# Altium PCB board.PcbDoc
Units mil, origin at the board's own origin, x right, y up, seen from the top; angles counter-clockwise.
Board outline 3775 x 4450 mil, 2 copper layers (Top Layer, Bottom Layer); 38 components, 132 nets, 376 pads, 40 vias.
Unrouted connection lines stored in the file: 9.
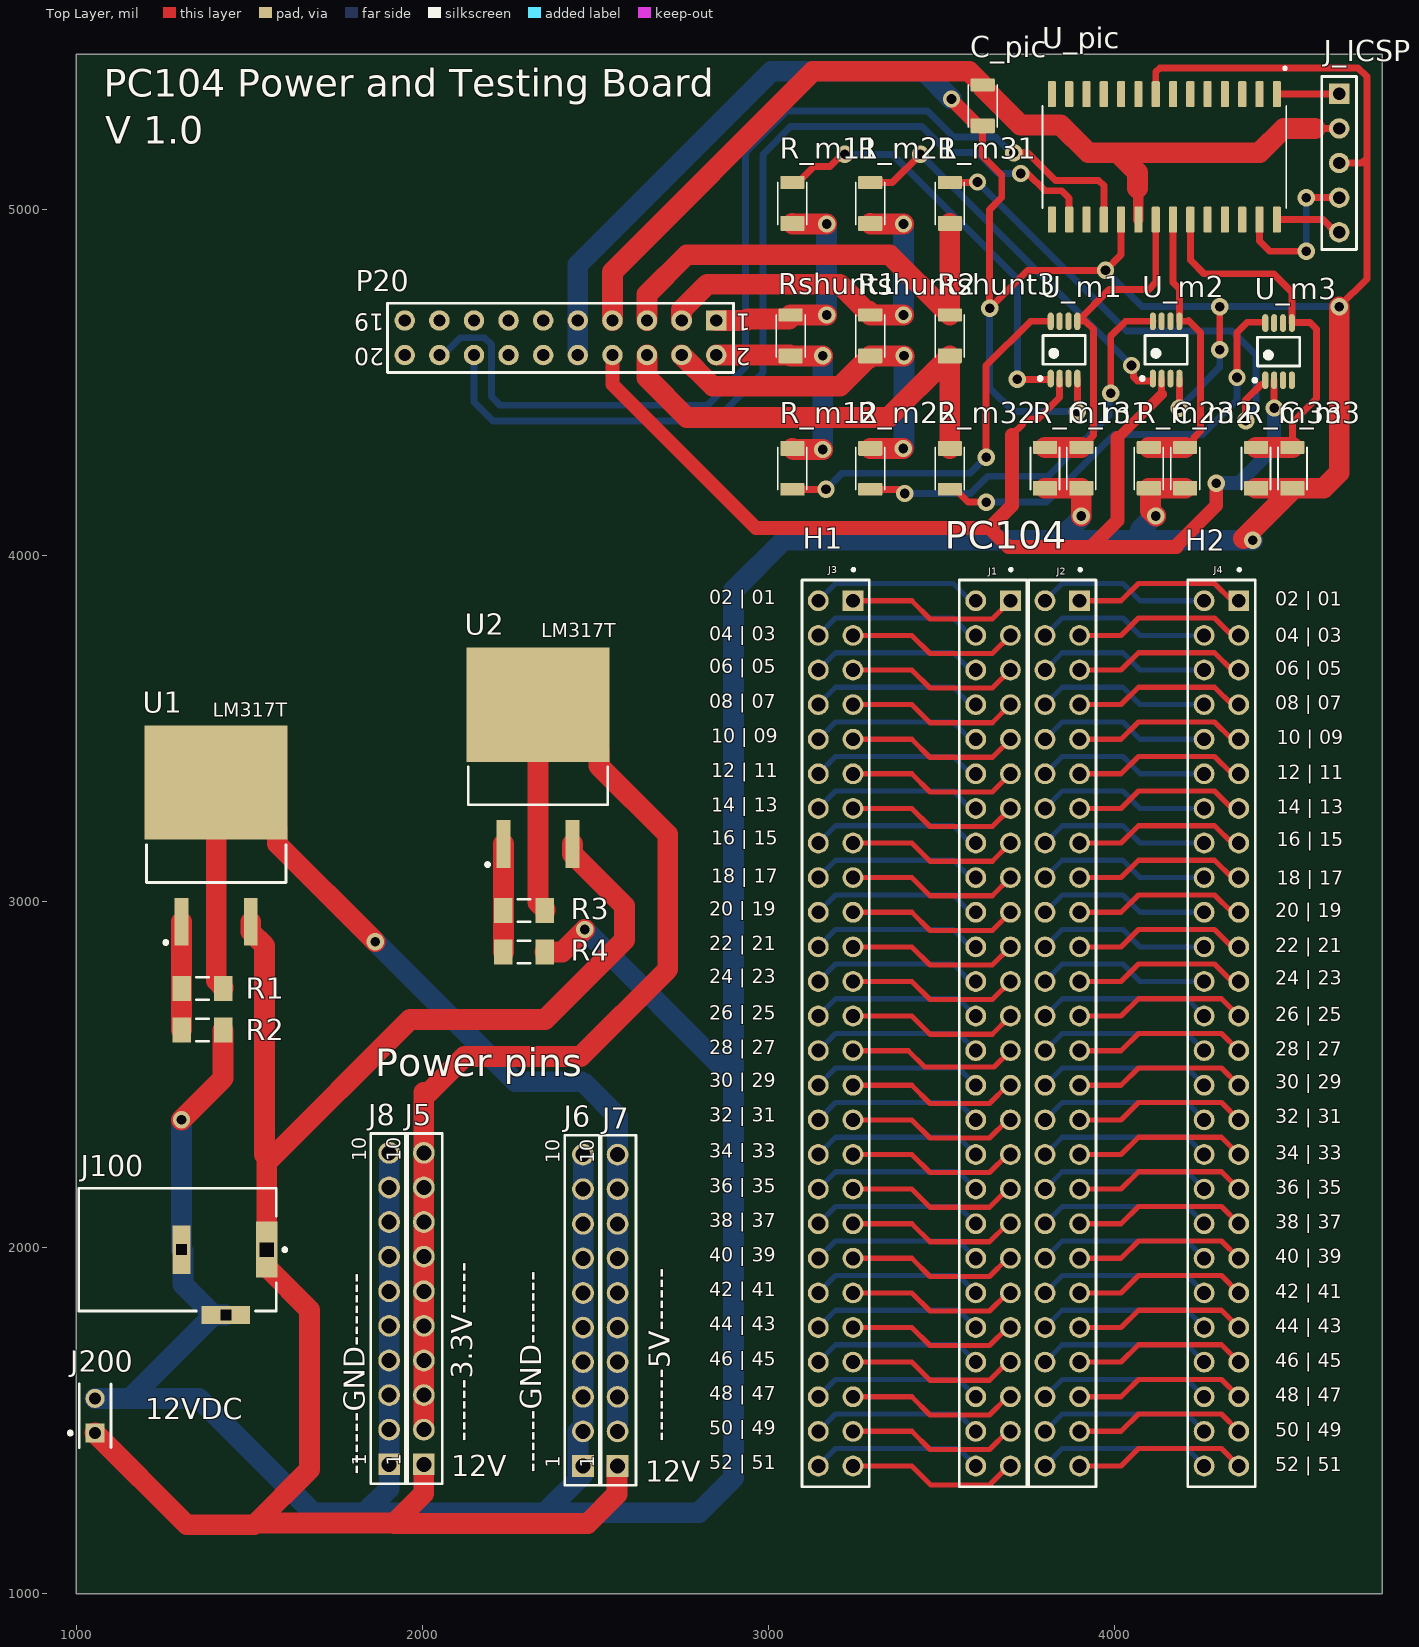
[diagram p0: Top Layer view]
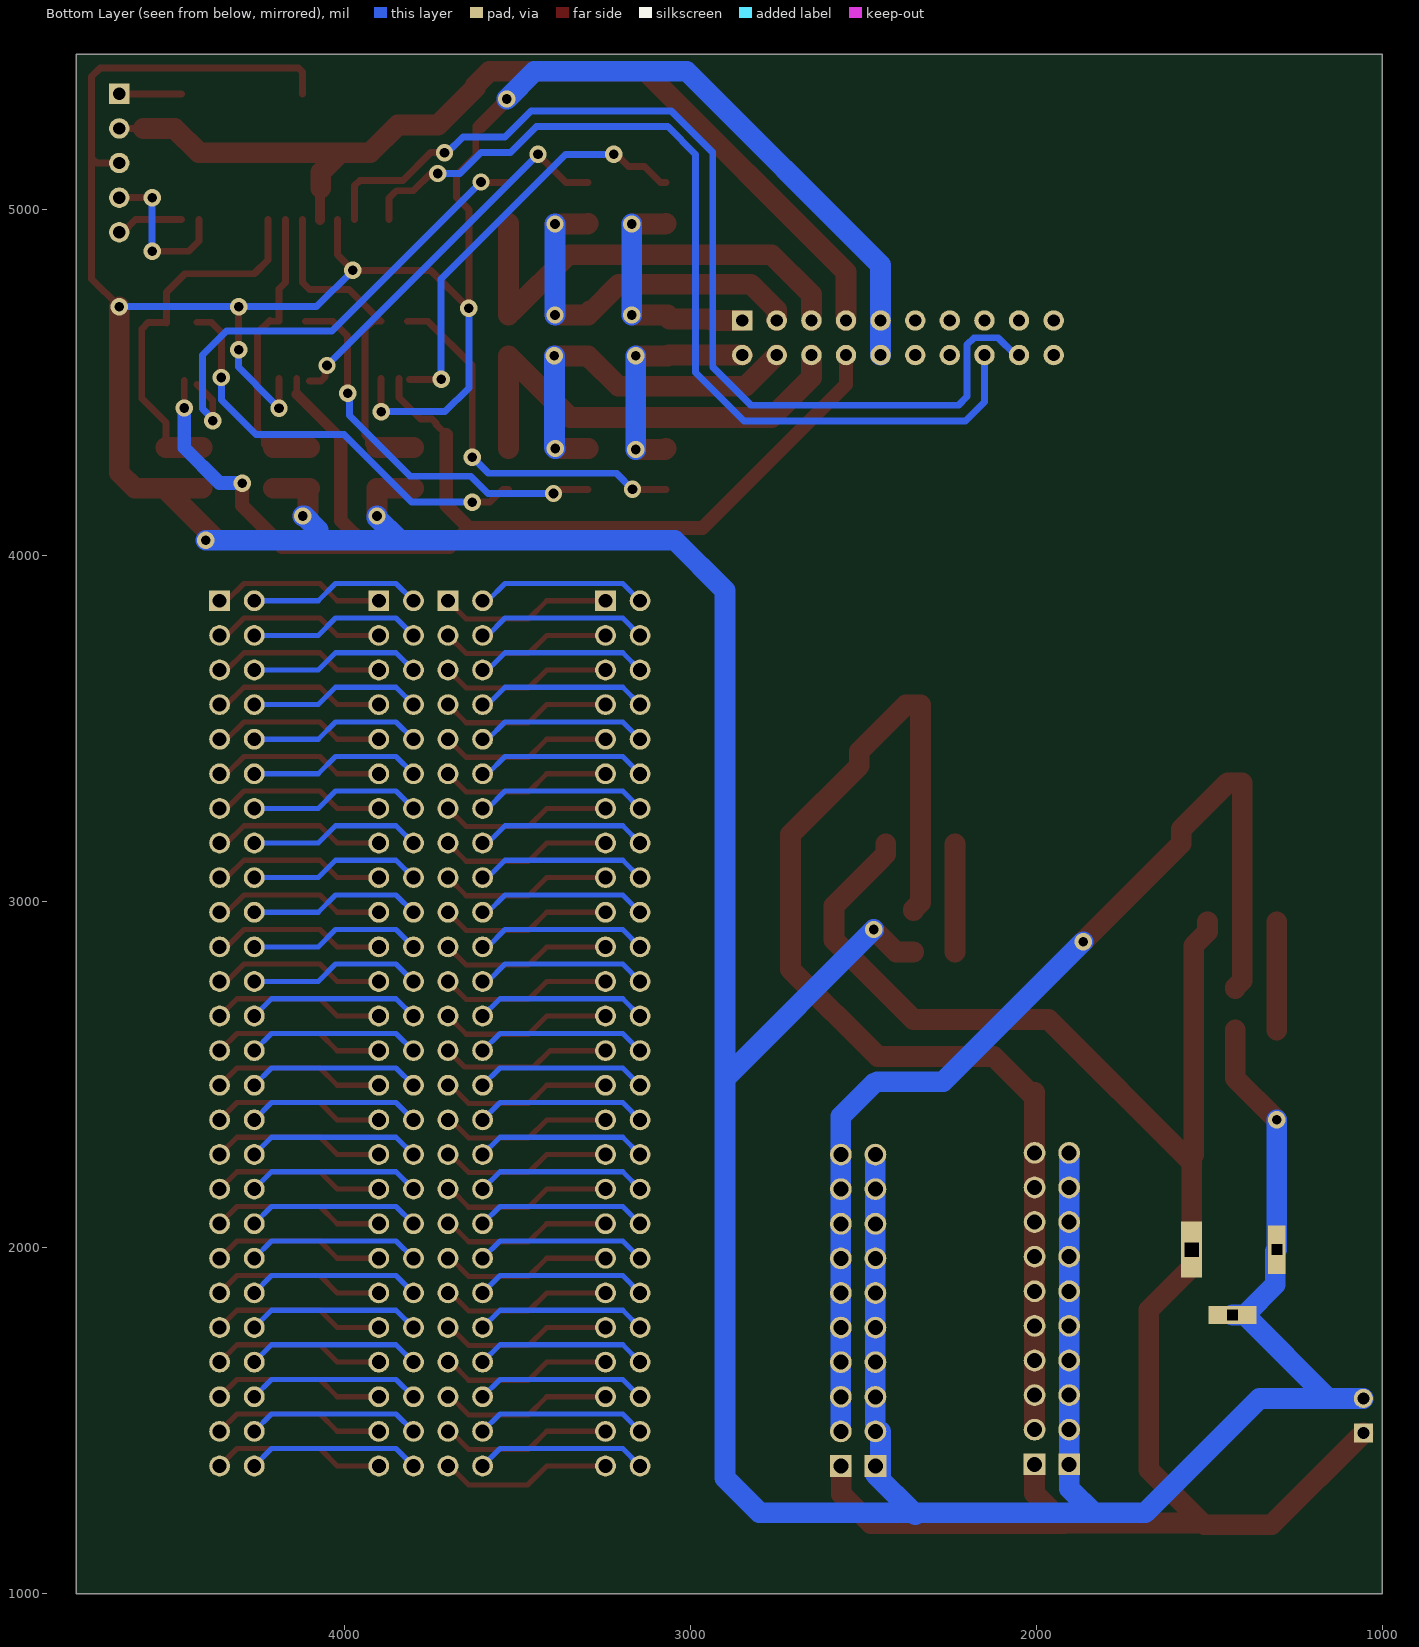
[diagram p1: Bottom Layer view, seen from below]

## Layer stack, top to bottom
Top Solder: solder mask 0.4, Solder Resist, Dk 3.5
Top Layer: signal copper 1.4
Dielectric 1: dielectric 12.6, FR-4, Dk 4.8
Bottom Layer: signal copper 1.4
Bottom Solder: solder mask 0.4, Solder Resist, Dk 3.5

## Board outline
1000,1000 4775,1000 4775,5450 1000,5450

## Design rules (kind name [scope] priority, off if disabled: settings)
Clearance [All] p1: gap=10 ignorepadtopadclearanceinfootprint=FALSE except(0: Arc-Hole Track-Hole SMDPad-Hole THPad-Hole Via-Hole Fill-Hole Poly-Hole Region-Hole Text-Hole)
ComponentClearance ComponentClearance_conn2 [InComponent('J5') vs InComponent('J8')] p1: gap=0 collisioncheckmode=3 verticalgap=0 showdistances=FALSE
ComponentClearance ComponentClearance_conn [InComponent('J6') vs InComponent('J7')] p2: gap=0 collisioncheckmode=3 verticalgap=0 showdistances=FALSE
ComponentClearance ComponentClearance_1 [InComponent('J3') vs InComponent('J4')] p3: gap=0 collisioncheckmode=3 verticalgap=0 showdistances=FALSE
ComponentClearance ComponentClearance_PC [InComponent('J3') vs InComponent('J4')] p4: gap=0 collisioncheckmode=3 verticalgap=10 showdistances=FALSE
ComponentClearance ComponentClearance_pc104 [InComponent('J1') vs InComponent('J2')] p5: gap=0 collisioncheckmode=3 verticalgap=0 showdistances=FALSE
ComponentClearance [All] p6: gap=10 collisioncheckmode=3 verticalgap=10 showdistances=FALSE
PolygonConnect [All] p1: connectstyle=Relief reliefconductorwidth=10 reliefentries=4 polygonreliefangle="90 Angle" airgapwidth=10
RoutingVias [All] p1: holewidth=28 width=50 viastyle="Through Hole" minholewidth=28 minwidth=50 maxholewidth=28 maxwidth=50
SolderMaskExpansion [All] p1: expansion=4 istentingtop=FALSE
Width [All] p1: maxlimit=1000 minlimit=15 preferedwidth=20
29 further rules are at their usual default settings.

## Classes and differential pairs
component class Current_Measurement: C_m1 C_m2 C_m3 C_pic J_ICSP P20 R_m11 R_m12 R_m13 R_m21 R_m22 R_m23 R_m31 R_m32 R_m33 Rshunt1 Rshunt2 Rshunt3 U_m1 U_m2 U_m3 U_pic
component class Schem: J1 J2 J3 J4 J5 J6 J7 J8 J100 J200 R1 R2 R3 R4 R24 R25 R26 Rcan S1 S4 U1 U2 U10

## Components (designator, comment, footprint, x,y, rotation, side; value= is the part's Value field where it differs from the comment)
C_m1 "22u" RESC3115X65N 3905,4252.68 r90 top
C_m2 "22u" RESC3115X65N 4205,4252.68 r90 top
C_m3 "22u" RESC3115X65N 4515,4252.68 r90 top
C_pic "100n" RESC3115X65N 3620,5300 r90 top
J1 "SSQ-126-03-G-D" *SAMTEC_SSQ-126-03-G-D_SSQ-126-03-G-D(Primary) 3650,2620 r90 top
J2 "SSQ-126-03-G-D" *SAMTEC_SSQ-126-03-G-D_SSQ-126-03-G-D(Primary) 3850,2620 r90 top
J3 "SSQ-126-03-G-D" *SAMTEC_SSQ-126-03-G-D_SSQ-126-03-G-D(Primary) 3195,2620 r90 top
J4 "SSQ-126-03-G-D" *SAMTEC_SSQ-126-03-G-D_SSQ-126-03-G-D(Primary) 4310,2620 r90 top
J5 "61301011121" 61301011121 2005,1824.76 r90 top
J6 "61301011121" 61301011121 2465,1819.76 r90 top
J7 "61301011121" 61301011121 2565,1819.76 r90 top
J8 "61301011121" 61301011121 1905,1824.76 r90 top
J100 "RAPC712X" SWITCH-RAPC712X-3_V 1428.03,1995 r270 top
J200 "5-146280-2" TECO-5-146280-2_V 1055,1515 r90 top
J_ICSP "" HDR1X5 4650,5335 r270 top
P20 "Header 10X2" HDR2X10 2850,4680 r180 top
R1 "CRCW12064K70FKEA" RESC3216X60X45ML15T20 1365,2750 r0 top
R2 "CRCW12064K70FKEA" RESC3216X60X45ML15T20 1365,2630 r180 top
R3 "CRCW12064K70FKEA" RESC3216X60X45ML15T20 2295,2975 r0 top
R4 "CRCW12064K70FKEA" RESC3216X60X45ML15T20 2295,2855 r180 top
R_m11 "150" RESC3115X65N 3070,5018.03 r90 top
R_m12 "150" RESC3115X65N 3070,4252.68 r270 top
R_m13 "7.5k" RESC3115X65N 3800,4252.68 r90 top
R_m21 "150" RESC3115X65N 3295,5018.03 r90 top
R_m22 "150" RESC3115X65N 3295,4252.68 r270 top
R_m23 "7.5k" RESC3115X65N 4100,4252.68 r90 top
R_m31 "150" RESC3115X65N 3525,5018.03 r90 top
R_m32 "150" RESC3115X65N 3525,4252.68 r270 top
R_m33 "7.5k" RESC3115X65N 4410,4252.68 r90 top
Rshunt1 "50m" RESC3115X65N 3065,4635.35 r90 top
Rshunt2 "50m" RESC3115X65N 3295,4635.35 r90 top
Rshunt3 "50m" RESC3115X65N 3525,4635.35 r90 top
U1 "LM317BD2TR4G" FP-936-03-MFG 1405,3240 r0 top
U2 "LM317BD2TR4G" FP-936-03-MFG 2335,3465 r0 top
U_m1 "LT6105IMS8#PBF" LT-MS8-8_L 3855,4595 r90 top
U_m2 "LT6105IMS8#PBF" LT-MS8-8_L 4150,4595 r90 top
U_m3 "LT6105IMS8#PBF" LT-MS8-8_L 4475,4590 r90 top
U_pic "PIC18LF26K83-I/SO" SOIC127P1030X265-28N 4145,5152.68 r270 top

## Footprints (in the part's own frame and the unit in brackets; to place one, negate y for a bottom-side part, rotate by r counter-clockwise, add the part's x,y. Pads: shape width x height; smd on the part's side, far side on the other; paste and mask are expansions set on the pad)
61301011121 [mm] "Pin Header, pitch 2.54 mm, THT, Vertical, single row, 10p"
  rect 1.6x1.6 hole 1.1: 1(-11.43,0)
  round 1.6 hole 1.1: 2(-8.89,0) 3(-6.35,0) 4(-3.81,0) 5(-1.27,0) 6(1.27,0) 7(3.81,0) 8(6.35,0) 9(8.89,0) 10(11.43,0)
  silkscreen extent -12.85,-1.34 12.85,1.34, body extent -12.7,-1.27 12.7,1.27, height 8.57
*SAMTEC_SSQ-126-03-G-D_SSQ-126-03-G-D(Primary) [mm]
  rect 1.53x1.53 hole 1.02: 01(31.75,-1.27)
  round 1.53 hole 1.02: 02(31.75,1.27) 03(29.21,-1.27) 04(29.21,1.27) 05(26.67,-1.27) 06(26.67,1.27) 07(24.13,-1.27) 08(24.13,1.27) 09(21.59,-1.27) 10(21.59,1.27) 11(19.05,-1.27) 12(19.05,1.27) 13(16.51,-1.27) 14(16.51,1.27) 15(13.97,-1.27) 16(13.97,1.27) 17(11.43,-1.27) 18(11.43,1.27) 19(8.89,-1.27) 20(8.89,1.27) 21(6.35,-1.27) 22(6.35,1.27) 23(3.81,-1.27) 24(3.81,1.27) 25(1.27,-1.27) 26(1.27,1.27) 27(-1.27,-1.27) 28(-1.27,1.27) 29(-3.81,-1.27) 30(-3.81,1.27) 31(-6.35,-1.27) 32(-6.35,1.27) 33(-8.89,-1.27) 34(-8.89,1.27) 35(-11.43,-1.27) 36(-11.43,1.27) 37(-13.97,-1.27) 38(-13.97,1.27) 39(-16.51,-1.27) 40(-16.51,1.27) 41(-19.05,-1.27) 42(-19.05,1.27) 43(-21.59,-1.27) 44(-21.59,1.27) 45(-24.13,-1.27) 46(-24.13,1.27) 47(-26.67,-1.27) 48(-26.67,1.27) 49(-29.21,-1.27) 50(-29.21,1.27) 51(-31.75,-1.27) 52(-31.75,1.27)
  silkscreen extent -33.28,-2.47 34.13,2.47
FP-936-03-MFG [mil]
  rect 40x137.95 smd paste+0 mask+0: 1(-100,-297.55) 3(100,-297.55)
  rect 412.99x329.92 smd paste+0 mask+0: 4(0,104.54)
  silkscreen extent -201,-362 201,-75, body extent -218,-370 218,273, height 10
HDR1X5 [mm] "Connector; Header; 5 Position"
  rect 1.5x1.5 hole 0.9: 1(0,0)
  round 1.5 hole 0.9: 2(2.54,0) 3(5.08,0) 4(7.62,0) 5(10.16,0)
  silkscreen extent -1.27,-1.27 11.43,1.27
HDR2X10 [mm] "Connector; Header; 10x2 Position"
  rect 1.5x1.5 hole 0.9: 1(0,0)
  round 1.5 hole 0.9: 2(0,2.54) 3(2.54,0) 4(2.54,2.54) 5(5.08,0) 6(5.08,2.54) 7(7.62,0) 8(7.62,2.54) 9(10.16,0) 10(10.16,2.54) 11(12.7,0) 12(12.7,2.54) 13(15.24,0) 14(15.24,2.54) 15(17.78,0) 16(17.78,2.54) 17(20.32,0) 18(20.32,2.54) 19(22.86,0) 20(22.86,2.54)
  silkscreen extent -1.27,-1.27 24.13,3.81
LT-MS8-8_L [mm] "SOP, 8-Leads, Body 3x3mm, Pitch 0.65mm, IPC High Density"
  oval 1.3x0.45 smd: 1(-2.1,0.975) 2(-2.1,0.325) 3(-2.1,-0.325) 4(-2.1,-0.975) 5(2.1,-0.975) 6(2.1,-0.325) 7(2.1,0.325) 8(2.1,0.975)
  silkscreen extent -2.22,-1.55 1.05,1.87, body extent -1.55,-1.55 1.55,1.55, height 1.1
RESC3115X65N [mm]
  rrect14% 1.09x1.77 smd: 1(-1.465,0)
  rrect14% 0.94x1.77 smd: 2(1.54,0)
  silkscreen extent -1.55,-1.06 1.55,1.06
RESC3216X60X45ML15T20 [mm] "Chip Resistor, 2-Leads, Body 3.3x1.75mm, IPC Low Density"
  rect 1.35x1.85 smd: 1(-1.525,0) 2(1.525,0)
  silkscreen extent -0.45,-0.82 0.45,0.82, body extent -1.65,-0.87 1.65,0.87, height 0.6
SOIC127P1030X265-28N [mm]
  rrect25% 1.9x0.6 smd: 1(-4.605,8.255) 2(-4.605,6.985) 3(-4.605,5.715) 4(-4.605,4.445) 5(-4.605,3.175) 6(-4.605,1.905) 7(-4.605,0.635) 8(-4.605,-0.635) 9(-4.605,-1.905) 10(-4.605,-3.175) 11(-4.605,-4.445) 12(-4.605,-5.715) 13(-4.605,-6.985) 14(-4.605,-8.255) 15(4.605,-8.255) 16(4.605,-6.985) 17(4.605,-5.715) 18(4.605,-4.445) 19(4.605,-3.175) 20(4.605,-1.905) 21(4.605,-0.635) 22(4.605,0.635) 23(4.605,1.905) 24(4.605,3.175) 25(4.605,4.445) 26(4.605,5.715) 27(4.605,6.985) 28(4.605,8.255)
  silkscreen extent -6.6,-8.95 3.75,8.95
SWITCH-RAPC712X-3_V [mm] "CONN, 3-Leads, Body 14.5x9mm"
  rect 4.1x1.55 hole 1.01 square: 1(0,3.125)
  rect 3.55x1.3 hole 0.76 square: 2(0,-3.125)
  rect 1.3x3.55 hole 0.76 square: 3(4.8,0.125)
  silkscreen extent -4.5,-10.67 4.5,4.58, body extent -4.5,-10.68 4.5,3.83, height 11
TECO-5-146280-2_V [mm] "Connector, 2-Leads, Body 4.67x2.34mm, Pitch 2.54mm"
  rect 1.4x1.4 hole 0.89: 1(-1.27,0)
  round 1.4 hole 0.89: 2(1.27,0)
  silkscreen extent -2.34,-1.17 2.34,1.94, body extent -2.34,-1.17 2.34,1.17, height 5.33

## Part data
C_m1 C_m2 C_m3 C_pic: library part Capacitor, "Capacitor"
J5 J6 J7 J8: library part CMP-1502-01082-1, "THT Vertical Pin Header WR-PHD, Pitch 2.54 mm, Single Row, 10 pins", Contact Resistance=20mOhm, Manufacturer="Wurth Elektronik", Operating Temperature=-40to105degC, Rated Current=3A, Withstanding Voltage=500VAC, Working Voltage=250VAC, Datasheet URL=https://katalog.we-online.de/em/datasheet/6130xx11121.pdf, Gender=Male, Manufacturer URL=http://www.we-online.de, Mounting Technology=THT, Orientation=Vertical, Package Reference=61301011121, Packaging=Bag, Part Number=61301011121, Pin Number=10, Pitch=2.54mm, Publisher=WurthElektronik, Row Number=Single
J100: library part CMP-2000-05383-1, "Conn Powerjack Mini R/A PCMT, 5 A, 3-Pin THD, RoHS", Color=Black, Current Rating=5A, Manufacturer=Switchcraft, Standard Package=2,500, Catalog Drawings="RAPC7(1,2)2XSide /  / RAPC7(1,2)2XTop", Category=Connectors,Interconnects, Connector Type=Jack, Contact Material=Brass, Contact Material - Plating=Nickel, Datasheet URL=https://datasheet.ciiva.com/391/rapc712x-cd-391666.pdf, Datasheet Version="Rev. A, 08/2005", Dynamic Catalog=SwitchcraftInc, Family=Barrel-PowerConnectors, Gender=Male, Housing Color=Black, Housing Material=Thermoplastic, Internal Switch(s)=SingleSwitch,NormallyClosed, Manufacturer URL=http://www.switchcraft.com/, Mating Products="SC1539-ND / -CONNPLUGMINIPWR2CONDBLK/RED / SC1051-ND / -CONNPLUGMINIPOWER2CONDBLACK", Mounting Type=ThroughHole,RightAngle, Number of Positions/Contacts=2Conductors,2Contacts, Other Names="Q2387461 / Q2526383 / RAPC712X-ND / SC237", Plug/Mating Plug Diameter=2.5mmID,5.5mmOD, RoHS Information=SwitchcraftRoHSInfo, Shielding=Unshielded, Termination=SolderEyelet(s)
J200: library part CMP-2000-07492-1, "Male Header, Pitch 2.54 mm, 1 x 2 Position, Height 8.21 mm, Tail Length 3.05 mm, -65 to 105 degC, RoHS, Bulk", Case\/Package=100, Colour=Black, Current Rating=3A, Flammability Rating=UL94V-0, High Temperature Housing=Yes, Manufacturer="TE Connectivity", Max Current Rating=5A, Max Operating Temperature=105degC, Min Operating Temperature=-65degC, Package Description="Male Header, Pitch 2.54 mm, 1 x 2 Position, Height 8.21 mm, Tail Length 3.05 mm", Package Quantity=500, Approvals=CSA, Board Standoff=No(Without), Connector Type=Header, Contact Gender=Male, Contact Material=CopperAlloy, Contact Mating Length=0.23inch, Contact Plating=Matte, Contact Protection=No(Without), Contact Shape=Square, Datasheet URL=http://www.te.com/commerce/DocumentDelivery/DDEController?Action=showdoc&DocId=Customer+Drawing%7F146280%7FH1%7Fpdf%7FEnglish%7FENG_CD_146280_H1.pdf%7F5-146280-2, Datasheet Version="Rev. H1, 08/2016", Depth=2.34mm, Gasket=No(Without), High Speed Serial Data Connector=No, Housing Colour=Black, Housing Material=Polymer, Keyed=No, Length=4.67mm, Manufacturer URL=http://www.te.com/, Mating Alignment=No(Without), Mating Connector Lock=No(Without), Mating Post Length=0.23inch, Mount=ThroughHole, Mounting Technology=ThroughHole, Number Of Contacts=2, Number of Positions=2, Number Of Rows=1, Orientation=Straight, Package Reference=5-146280-2, Packaging=Carton, Panel Mount Retention=No(Without), PCB Mount Retention=Without, PCB Mounting Orientation=Vertical, PCB Thickness=0.063inch, Pitch=2.54mm, Radiation Hardening=No, RoHSCompliant=true, Row Spacing=2.54mm, Selectively Loaded=No(Without), Stabilizers=No(Without), Termination=ThroughHole, Termination Post Length=0.12inch
J_ICSP: library part PinHeader1x5, "Plug connector"
P20: "Header, 10-Pin, Dual row", LatestRevisionDate=17-Jul-2002, LatestRevisionNote="Re-released for DXP Platform.", Publisher="Altium Limited"
R1 R2 R3 R4: library part CMP-2100-03618-1, "Chip Resistor, 4.7 KOhm, +/- 1%, 0.25 W, -55 to 155 degC, 1206 (3216 Metric), RoHS, Tape and Reel", Case Code (Imperial)=1206, Case Code (Metric)=3216, Manufacturer="Vishay Semiconductor", Max Operating Temperature=155degC, Max Power Dissipation=250mW, Min Operating Temperature=-55degC, Package Description="2-Pin Surface Mount Device, Body 3.15 x 1.6 mm", Package Quantity=10, Package Reference=1206.0, Resistance=4.7KOhm, Temperature Coefficient=100ppm/degreesC, Tolerance=1%, Voltage Rating=200V, Case/Package=1206, Composition=ThickFilm, Contact Plating=Tin, Datasheet URL=http://www.vishay.com/docs/20035/dcrcwe3.pdf, Datasheet Version=41061.0, Depth=1.6mm, Height=0.55mm, Lead Free=LeadFree, Length=3.2mm, Manufacturer URL=http://www.vishay.com/, Military Standard=Not, Mount=SurfaceMount, Number of Terminations=2, Packaging=TapeandReel, Power Rating=250mW, Radiation Hardening=No, REACH SVHC=Unknown, RoHSCompliant=true, Termination=SMD/SMT, Voltage Rating (DC)=200V, Weight=0.000353oz, Width=1.6mm
R_m11 R_m12 R_m13 R_m21 R_m22 R_m23 R_m31 R_m32 R_m33 Rshunt1 Rshunt2 Rshunt3: library part Resistor, "Resistor"
U1 U2: library part CMP-07128-000007-1, "IC REG LINEAR POS ADJ 1.5A D2PAK", Dropout Voltage=2.25V, Manufacturer="ON Semiconductor", Max Junction Temp=+125°C, Max Supply Voltage=40V, Min Supply Voltage=2.8V, Output Current=1.5A, Output Voltage=1.2-37V, Package=936-03, Temperature="-40°C to +125°C", Temperature Range Low=-40°C, Automotive=Yes, Automotive Grade="Grade 1", Category=IC, ComponentLink2Description=Datasheet, ComponentLink2URL=https://www.onsemi.com/pub/Collateral/LM317-D.PDF, Device Class L1="Integrated Circuits (ICs)", Device Class L2="Power Management ICs", Device Class L3="Voltage Regulators - Linear", Digikey Description="IC REG LINEAR POS ADJ 1.5A D2PAK", Footprint Url=https://www.onsemi.com/pub/Collateral/936-03.PDF, Height=4.826mm, Lead Free=Yes, Manufacturer Part Number=LM317BD2TR4G, Mouser Description="Linear Voltage Regulators 1.5A ADJ 1.2-37V Positive", Number Of Outputs=1, Octopart=https://octopart.com/lm317bd2tr4g-on+semiconductor-530493, Output Type=AdjustableProgrammable, RoHS=TRUE, Standoff Height=0mm, Temperature Range High=+125°C
U_m1 U_m2 U_m3: "Single Channel, Precision, Rail-to-Rail Input Current Sense Amplifier, 0.1 MHz Typical GBW, 2.85 to 36 V, 8-Pin SOP (MS8-8), Industrial, Pb-Free", Linear Technology Part Number=LT6105, Manufacturer="Linear Technology", Channels (#)=1, ComponentLink1Description="Manufacturer URL", ComponentLink1URL=http://www.linear.com/, ComponentLink2Description=Datasheet, ComponentLink2URL=http://cds.linear.com/docs/en/datasheet/6105fa.pdf, ComponentLink3Description="Package Specification", ComponentLink3URL=http://cds.linear.com/docs/en/packaging/05081610_G_SO8.pdf, DatasheetVersion="Rev. A", GBW (MHz) Typical=0.1, Is (mA) Typical=0.2, Mounting Technology="Surface Mount", PackageDescription="8-Lead Plastic Small Outline, Body 3.9 x 4.9 mm, Pitch 1.27 mm", PackageReference=LT-MS8-8, PackageVersion="Rev G", PartNumber=LT6105IMS8#PBF, RevisionNote="URLs updated", RoHS=Pb-Free, Type=CSA, Vos (mV) Guaranteed=0.3, Vos (mV) Typical=0.1, Vs Max (V)=36, Vs Min (V)=2.85
U_pic: library part PIC18F26K83-_/SO, "Flash Microcontrollers  with 10-Bit A/D and nanoWatt Technology"
J1 J2 J3 J4: Check_prices=https://www.snapeda.com/parts/SSQ-126-03-G-D/Samtec/view-part/3311208/?ref=eda, SnapEDA_Link=https://www.snapeda.com/parts/SSQ-126-03-G-D/Samtec/view-part/3311208/?ref=snap

## Via types
v1: diameter 50, hole 28, Top Layer to Bottom Layer, 40 vias

## Nets (pads, with @x,y where several pads share a name; then routed paths per layer and width w, separated by ;. In a path a pad name is that pad's centre, name@x,y a point inside that pad or via, vN(x,y) a via of type N, cw(c..) or ccw(c..) an arc to the next point about the centre after c; other vN are vias at no path point)
3.3V: C_pic.2 J_ICSP.2 P20.7 U_pic.20 | length 2825.6
  Top Layer w20: 4580,5235 J_ICSP.2
  Top Layer w30: U_pic.20 4070,5060
  Top Layer w60: P20.7 2550,4820 3130,5400 3580.63,5400 3620.63,5360 3620.63,5353.35 3728.98,5245 3845,5245 3925,5165 4010,5165 ; 4067.65,5062.35 4067.65,5107.35 4010,5165 ; 4580,5235 4490,5235 4420,5165 4010,5165
5V: P20.8 U_m1.2 U_m2.2 U_m3.2 | length 3642.6
  Top Layer w20: 3705,4350 3735,4380 3735,4383.28 3746.72,4395 3780,4395 3842.2,4457.2 U_m1.2 ; 4137.2,4467.2 U_m2.2 ; v1(4462.2,4427.2) U_m3.2
  Top Layer w30: 4010,4340 4137.2,4467.2
  Top Layer w40: P20.8 2550,4495 2965,4080 3640,4080 ; 3705,4350 3705,4145 3640,4080 ; 3937.5,4030 4010,4102.5 4010,4340 ; 4180,4025 3695,4025 3640,4080 ; 4180,4030 4295,4145 v1(4295,4210)
  Bottom Layer w40: v1(4295,4210) 4360,4210 4462.2,4312.2 v1(4462.2,4427.2)
+3V3: J5.2 J5.3 J5.4 J5.5 J5.6 J5.7 J5.8 J5.9 J5.10 R3.2 U2.4 | length 3359.3
  Top Layer w60: J5.2 J5.3 J5.4 J5.5 J5.6 J5.7 J5.8 J5.9 J5.10 2005,2450 ; 2020,2450 2122.84,2552.84 2457.84,2552.84 2710,2805 2710,3194.54 2511.5,3393.04 2511.5,3434.58 2376.54,3569.54 U2.4 2335,2998.03 2355.04,2977.99 R3.2
+5V: J7.2 J7.3 J7.4 J7.5 J7.6 J7.7 J7.8 J7.9 J7.10 R1.2 U1.4 | length 3085.3
  Top Layer w60: R1.2 1425.04,2752.99 1405,2773.03 U1.4 1446.54,3344.54 1581.5,3209.58 1581.5,3168.04 v1(1864.54,2885) v1@1865,2885
  Bottom Layer w60: v1(1864.54,2885) 2269.54,2480 2460,2480 ; 2470,2475 2565,2380 J7.10 J7.9 J7.8 J7.7 J7.6 J7.5 J7.4 J7.3 J7.2
A1: J1.01 J3.01 | length 498.4
  Top Layer w15: J3.01 3415,3870 3467.38,3817.62 3647.62,3817.62 J1.01
A3: J1.03 J3.03 | length 498.4
  Top Layer w15: J3.03 3415,3770 3467.38,3717.62 3647.62,3717.62 J1.03
A5: J1.05 J3.05 | length 498.4
  Top Layer w15: J3.05 3415,3670 3467.38,3617.62 3647.62,3617.62 J1.05
A7: J1.07 J3.07 | length 498.4
  Top Layer w15: J3.07 3415,3570 3467.38,3517.62 3647.62,3517.62 J1.07
A9: J1.09 J3.09 | length 498.4
  Top Layer w15: J3.09 3415,3470 3467.38,3417.62 3647.62,3417.62 J1.09
A11: J1.11 J3.11 | length 498.4
  Top Layer w15: J3.11 3415,3370 3467.38,3317.62 3647.62,3317.62 J1.11
A13: J1.13 J3.13 | length 511
  Top Layer w10: J1.13 J1.13@3708.92,3261.08
  Top Layer w15: J3.13 3415,3270 3467.38,3217.62 3647.62,3217.62 J1.13
A15: J1.15 J3.15 | length 498.4
  Top Layer w15: J3.15 3415,3170 3467.38,3117.62 3647.62,3117.62 J1.15
A17: J1.17 J3.17 | length 498.4
  Top Layer w15: J3.17 3415,3070 3467.38,3017.62 3647.62,3017.62 J1.17
A19: J1.19 J3.19 | length 498.4
  Top Layer w15: J3.19 3415,2970 3467.38,2917.62 3647.62,2917.62 J1.19
A21: J1.21 J3.21 | length 498.4
  Top Layer w15: J3.21 3415,2870 3467.38,2817.62 3647.62,2817.62 J1.21
A23: J1.23 J3.23 | length 498.4
  Top Layer w15: J3.23 3415,2770 3467.38,2717.62 3647.62,2717.62 J1.23
A25: J1.25 J3.25 | length 498.4
  Top Layer w15: J3.25 3415,2670 3467.38,2617.62 3647.62,2617.62 J1.25
A27: J1.27 J3.27 | length 494.4
  Top Layer w15: J3.27 3405,2570 3452.62,2522.38 3652.38,2522.38 J1.27
A29: J1.29 J3.29 | length 498.4
  Top Layer w15: J3.29 3415,2470 3467.38,2417.62 3640,2417.62 3692.38,2470 J1.29
A31: J1.31 J3.31 | length 498.4
  Top Layer w15: J3.31 3415,2370 3467.38,2317.62 3640,2317.62 3692.38,2370 J1.31
A33: J1.33 J3.33 | length 498.4
  Top Layer w15: J3.33 3415,2270 3467.38,2217.62 3640,2217.62 3692.38,2270 J1.33
A35: J1.35 J3.35 | length 498.4
  Top Layer w15: J3.35 3415,2170 3467.38,2117.62 3640,2117.62 3692.38,2170 J1.35
A37: J1.37 J3.37 | length 498.4
  Top Layer w15: J3.37 3415,2070 3467.38,2017.62 3640,2017.62 3692.38,2070 J1.37
A39: J1.39 J3.39 | length 498.4
  Top Layer w15: J3.39 3415,1970 3467.38,1917.62 3640,1917.62 3692.38,1970 J1.39
A41: J1.41 J3.41 | length 498.4
  Top Layer w15: J3.41 3415,1870 3467.38,1817.62 3640,1817.62 3692.38,1870 J1.41
A43: J1.43 J3.43 | length 498.4
  Top Layer w15: J3.43 3415,1770 3467.38,1717.62 3640,1717.62 3692.38,1770 J1.43
A45: J1.45 J3.45 | length 498.4
  Top Layer w15: J3.45 3415,1670 3467.38,1617.62 3640,1617.62 3692.38,1670 J1.45
A47: J1.47 J3.47 | length 498.4
  Top Layer w15: J3.47 3415,1570 3467.38,1517.62 3640,1517.62 3692.38,1570 J1.47
A49: J1.49 J3.49 | length 498.4
  Top Layer w15: J3.49 3415,1470 3467.38,1417.62 3640,1417.62 3692.38,1470 J1.49
A51: J1.51 J3.51 | length 500.6
  Top Layer w15: J3.51 3415,1370 3470,1315 3640,1315 3695,1370 J1.51
B2: J1.02 J3.02 | length 496.4
  Bottom Layer w15: J3.02 3195,3920 3535,3920 3585,3870 J1.02
B4: J1.04 J3.04 | length 496.4
  Bottom Layer w15: J3.04 3195,3820 3535,3820 3585,3770 J1.04
B6: J1.06 J3.06 | length 496.4
  Bottom Layer w15: J3.06 3195,3720 3535,3720 3585,3670 J1.06
B8: J1.08 J3.08 | length 496.4
  Bottom Layer w15: J3.08 3195,3620 3535,3620 3585,3570 J1.08
B10: J1.10 J3.10 | length 496.4
  Bottom Layer w15: J3.10 3195,3520 3535,3520 3585,3470 J1.10
B12: J1.12 J3.12 | length 496.4
  Bottom Layer w15: J3.12 3195,3420 3535,3420 3585,3370 J1.12
B14: J1.14 J3.14 | length 496.4
  Bottom Layer w15: J3.14 3195,3320 3535,3320 3585,3270 J1.14
B16: J1.16 J3.16 | length 496.4
  Bottom Layer w15: J3.16 3195,3220 3535,3220 3585,3170 J1.16
B18: J1.18 J3.18 | length 496.4
  Bottom Layer w15: J3.18 3195,3120 3535,3120 3585,3070 J1.18
B20: J1.20 J3.20 | length 496.4
  Bottom Layer w15: J3.20 3195,3020 3535,3020 3585,2970 J1.20
B22: J1.22 J3.22 | length 496.4
  Bottom Layer w15: J3.22 3195,2920 3535,2920 3585,2870 J1.22
B24: J1.24 J3.24 | length 496.4
  Bottom Layer w15: J3.24 3195,2820 3535,2820 3585,2770 J1.24
B26: J1.26 J3.26 | length 496.4
  Bottom Layer w15: J3.26 3195,2720 3550,2720 J1.26
B28: J1.28 J3.28 | length 496.4
  Bottom Layer w15: J3.28 3195,2620 3550,2620 J1.28
B30: J1.30 J3.30 | length 496.4
  Bottom Layer w15: J3.30 3195,2520 3550,2520 J1.30
B32: J1.32 J3.32 | length 496.4
  Bottom Layer w15: J3.32 3195,2420 3550,2420 J1.32
B34: J1.34 J3.34 | length 496.4
  Bottom Layer w15: J3.34 3195,2320 3550,2320 J1.34
B36: J1.36 J3.36 | length 496.4
  Bottom Layer w15: J3.36 3195,2220 3550,2220 J1.36
B38: J1.38 J3.38 | length 496.4
  Bottom Layer w15: J3.38 3195,2120 3550,2120 J1.38
B40: J1.40 J3.40 | length 496.4
  Bottom Layer w15: J3.40 3195,2020 3550,2020 J1.40
B42: J1.42 J3.42 | length 496.4
  Bottom Layer w15: J3.42 3195,1920 3550,1920 J1.42
B44: J1.44 J3.44 | length 496.4
  Bottom Layer w15: J3.44 3195,1820 3550,1820 J1.44
B46: J1.46 J3.46 | length 496.4
  Bottom Layer w15: J3.46 3195,1720 3550,1720 J1.46
B48: J1.48 J3.48 | length 496.4
  Bottom Layer w15: J3.48 3195,1620 3550,1620 J1.48
B50: J1.50 J3.50 | length 496.4
  Bottom Layer w15: J3.50 3195,1520 3550,1520 J1.50
B52: J1.52 J3.52 | length 496.4
  Bottom Layer w15: J3.52 3195,1420 3550,1420 J1.52
C1: J2.01 J4.01 | length 533.4
  Top Layer w15: J2.01@3922.62,3892.62 J2.01 4020,3870 4070,3920 4290,3920 4340,3870 J4.01
C3: J2.03 J4.03 | length 508.5
  Top Layer w15: J2.03@3905,3765 J2.03 4020,3770 4070,3820 4290,3820 4340,3770 J4.03
C5: J2.05 J4.05 | length 508.5
  Top Layer w15: J2.05@3905,3665 J2.05 4020,3670 4070,3720 4290,3720 4340,3670 J4.05
C7: J2.07 J4.07 | length 508.5
  Top Layer w15: J2.07@3905,3565 J2.07 4020,3570 4070,3620 4290,3620 4340,3570 J4.07
C9: J2.09 J4.09 | length 508.5
  Top Layer w15: J2.09@3905,3465 J2.09 4020,3470 4070,3520 4290,3520 4340,3470 J4.09
C11: J2.11 J4.11 | length 508.5
  Top Layer w15: J2.11@3905,3365 J2.11 4020,3370 4070,3420 4290,3420 4340,3370 J4.11
C13: J2.13 J4.13 | length 508.5
  Top Layer w15: J2.13@3905,3265 J2.13 4020,3270 4070,3320 4290,3320 4340,3270 J4.13
C15: J2.15 J4.15 | length 508.5
  Top Layer w15: J2.15@3905,3165 J2.15 4020,3170 4070,3220 4290,3220 4340,3170 J4.15
C17: J2.17 J4.17 | length 508.5
  Top Layer w15: J2.17@3905,3065 J2.17 4020,3070 4070,3120 4290,3120 4340,3070 J4.17
C19: J2.19 J4.19 | length 501.4
  Top Layer w15: J2.19 4020,2970 4070,3020 4290,3020 4340,2970 J4.19
C21: J2.21 J4.21 | length 501.4
  Top Layer w15: J2.21 4020,2870 4070,2920 4290,2920 4340,2870 J4.21
C23: J2.23 J4.23 | length 501.4
  Top Layer w15: J2.23 4020,2770 4070,2820 4290,2820 4340,2770 J4.23
C25: J2.25 J4.25 | length 501.4
  Top Layer w15: J2.25 4020,2670 4070,2720 4310,2720 J4.25
C27: J2.27 J4.27 | length 501.4
  Top Layer w15: J2.27 4020,2570 4070,2620 4310,2620 J4.27
C29: J2.29 J4.29 | length 501.4
  Top Layer w15: J2.29 4020,2470 4070,2520 4310,2520 J4.29
C31: J2.31 J4.31 | length 501.4
  Top Layer w15: J2.31 4020,2370 4070,2420 4310,2420 J4.31
C33: J2.33 J4.33 | length 501.4
  Top Layer w15: J2.33 4020,2270 4070,2320 4310,2320 J4.33
C35: J2.35 J4.35 | length 501.4
  Top Layer w15: J2.35 4020,2170 4070,2220 4310,2220 J4.35
C37: J2.37 J4.37 | length 501.4
  Top Layer w15: J2.37 4020,2070 4070,2120 4310,2120 J4.37
C39: J2.39 J4.39 | length 501.4
  Top Layer w15: J2.39 4020,1970 4070,2020 4310,2020 J4.39
C41: J2.41 J4.41 | length 501.4
  Top Layer w15: J2.41 4020,1870 4070,1920 4310,1920 J4.41
C43: J2.43 J4.43 | length 501.4
  Top Layer w15: J2.43 4020,1770 4070,1820 4310,1820 J4.43
C45: J2.45 J4.45 | length 501.4
  Top Layer w15: J2.45 4020,1670 4070,1720 4310,1720 J4.45
C47: J2.47 J4.47 | length 501.4
  Top Layer w15: J2.47 4020,1570 4070,1620 4310,1620 J4.47
C49: J2.49 J4.49 | length 501.4
  Top Layer w15: J2.49 4020,1470 4070,1520 4310,1520 J4.49
C51: J2.51 J4.51 | length 501.4
  Top Layer w15: J2.51 4020,1370 4070,1420 4310,1420 J4.51
D2: J2.02 J4.02 | length 501.4
  Bottom Layer w15: J2.02 3850,3920 4025,3920 4075,3870 J4.02
D4: J2.04 J4.04 | length 501.4
  Bottom Layer w15: J2.04 3850,3820 4025,3820 4075,3770 J4.04
D6: J2.06 J4.06 | length 501.4
  Bottom Layer w15: J2.06 3850,3720 4025,3720 4075,3670 J4.06
D8: J2.08 J4.08 | length 501.4
  Bottom Layer w15: J2.08 3850,3620 4025,3620 4075,3570 J4.08
D10: J2.10 J4.10 | length 501.4
  Bottom Layer w15: J2.10 3850,3520 4025,3520 4075,3470 J4.10
D12: J2.12 J4.12 | length 501.4
  Bottom Layer w15: J2.12 3850,3420 4025,3420 4075,3370 J4.12
D14: J2.14 J4.14 | length 501.4
  Bottom Layer w15: J2.14 3850,3320 4025,3320 4075,3270 J4.14
D16: J2.16 J4.16 | length 501.4
  Bottom Layer w15: J2.16 3850,3220 4025,3220 4075,3170 J4.16
D18: J2.18 J4.18 | length 501.4
  Bottom Layer w15: J2.18 3850,3120 4025,3120 4075,3070 J4.18
D20: J2.20 J4.20 | length 501.4
  Bottom Layer w15: J2.20 3850,3020 4025,3020 4075,2970 J4.20
D22: J2.22 J4.22 | length 501.4
  Bottom Layer w15: J2.22 3850,2920 4025,2920 4075,2870 J4.22
D24: J2.24 J4.24 | length 501.4
  Bottom Layer w15: J2.24 3850,2820 4025,2820 4075,2770 J4.24
D26: J2.26 J4.26 | length 501.4
  Bottom Layer w15: J2.26 3850,2720 4210,2720 J4.26
D28: J2.28 J4.28 | length 501.4
  Bottom Layer w15: J2.28 3850,2620 4210,2620 J4.28
D30: J2.30 J4.30 | length 501.4
  Bottom Layer w15: J2.30 3850,2520 4210,2520 J4.30
D32: J2.32 J4.32 | length 501.4
  Bottom Layer w15: J2.32 3850,2420 4210,2420 J4.32
D34: J2.34 J4.34 | length 501.4
  Bottom Layer w15: J2.34 3850,2320 4210,2320 J4.34
D36: J2.36 J4.36 | length 501.4
  Bottom Layer w15: J2.36 3850,2220 4210,2220 J4.36
D38: J2.38 J4.38 | length 501.4
  Bottom Layer w15: J2.38 3850,2120 4210,2120 J4.38
D40: J2.40 J4.40 | length 501.4
  Bottom Layer w15: J2.40 3850,2020 4210,2020 J4.40
D42: J2.42 J4.42 | length 501.4
  Bottom Layer w15: J2.42 3850,1920 4210,1920 J4.42
D44: J2.44 J4.44 | length 501.4
  Bottom Layer w15: J2.44 3850,1820 4210,1820 J4.44
D46: J2.46 J4.46 | length 501.4
  Bottom Layer w15: J2.46 3850,1720 4210,1720 J4.46
D48: J2.48 J4.48 | length 501.4
  Bottom Layer w15: J2.48 3850,1620 4210,1620 J4.48
D50: J2.50 J4.50 | length 501.4
  Bottom Layer w15: J2.50 3850,1520 4210,1520 J4.50
D52: J2.52 J4.52 | length 501.4
  Bottom Layer w15: J2.52 3850,1420 4210,1420 J4.52
GND: C_m1.1 C_m2.1 C_m3.1 C_pic.1 J6.1 J6.2 J6.3 J6.4 J6.5 J6.6 J6.7 J6.8 J6.9 J6.10 J8.1 J8.2 J8.3 J8.4 J8.5 J8.6 J8.7 J8.8 J8.9 J8.10 J100.2 J100.3 J200.2 J_ICSP.3 P20.9 P20.10 P20.11 P20.12 P20.13 P20.14 P20.15 P20.17 P20.19 P20.20 R2.1 R4.1 R_m13.1 R_m23.1 R_m33.1 U_m1.4 U_m2.4 U_m3.4 U_pic.8 U_pic.19 | length 17913.4
  Top Layer w20: v1@3530,5318.94 v1(3530,5320) ; C_pic.1@3606.61,5242.32 C_pic.1 3620,5155 3675,5100 3675,5035 3640,5000 v1(3640,4715) 3750,4825 v1(3975,4825) 4020,4870 U_pic.19 ; v1(3893.39,4416.61) U_m1.4 ; U_pic.8 4120,5398.28 4131.72,5410 4705,5410 4730,5385 4730,5150 ; v1(4188.39,4426.61) U_m2.4 ; v1(4305,4595) 4310,4600 4305,4605 v1(4305,4720) ; v1(4650,4720) 4730,4800 4730,5150 ; J_ICSP.3 4715,5135 4730,5150
  Top Layer w40: v1@3530,5318.94 C_pic.1@3606.61,5242.32
  Top Layer w60: v1(1305,2370) 1425.04,2490.04 R2.1 ; R4.1 2405,2855 v1(2470,2920) ; R_m13.1 C_m1.1 v1(3905,4115) ; v1(4120,4115) 4104.84,4130.16 4104.84,4190.16 R_m23.1 C_m2.1 ; 4373.7,4050 4515,4191.3 C_m3.1 ; R_m33.1 C_m3.1 ; v1(4650,4720) 4650,4240 4605,4195 C_m3.1
  Bottom Layer w20: v1(3640,4715) 3640,4485 3708.39,4416.61 v1(3893.39,4416.61) ; v1(3975,4825) 4080,4720 v1(4305,4720) 4640,4720 4645,4725 v1(4650,4720) ; v1(4188.39,4426.61) 4255,4493.23 4255,4495 4305,4545 v1(4305,4595)
  Bottom Layer w60: J200.2 1156.46,1565 ; v1(1305,2370) J100.2 1309.41,1990.59 1309.41,1894.09 J100.3@1397.48,1806.02 ; J100.3 J100.3@1397.48,1806.02 ; J8.10 J8.9 J8.8 J8.7 J8.6 J8.5 J8.4 J8.3 J8.2 J8.1 1905,1305 1835,1235 ; 2350,1230 2355,1235 ; P20.10 P20.9 2450,4840 3010,5400 3450,5400 v1(3530,5320) ; J6.1@2450.67,1345.67 J6.2@2450.67,1469.76 ; J6.1@2465.67,1345.67 2355,1235 ; J6.2@2465.67,1469.76 J6.10@2465.67,2269.76 ; v1(2470,2920) 2900,2490 ; 3845,4050 3905,4110 v1(3905,4115) ; 4075,4050 4075,4075 4115,4115 v1(4120,4115) ; v1(4400,4045) 3045,4045 2900,3900 2900,2490 ; 1156.46,1565 1355,1565 1685,1235 1835,1235 ; 1156.46,1565 J100.3@1397.48,1806.02 ; 1835,1235 2355,1235 ; 2355,1235 2800,1235 2900,1335 2900,2490
I_m1: C_m1.2 R_m13.2 U_m1.5 U_pic.21 | length 981.3
  Top Layer w20: C_m1.2 3921.34,4313.31 3929.84,4321.81 3929.84,4338.15 3940,4348.31 3940,4655 3917.32,4677.68 U_m1.5 3985.71,4770 4100,4770 4120,4790 U_pic.21
  Top Layer w60: R_m13.2 C_m1.2
I_m2: C_m2.2 R_m23.2 U_m2.5 U_pic.22 | length 843.3
  Top Layer w20: U_pic.22 4170,4790 4188.39,4771.61 U_m2.5 4212.68,4677.68 4215,4680 4250,4645 4250,4360 4229.84,4339.84 4229.84,4321.81 4221.34,4313.31 C_m2.2
  Top Layer w60: R_m23.2 C_m2.2
I_m3: C_m3.2 R_m33.2 U_m3.5 U_pic.23 | length 1093.9
  Top Layer w20: U_pic.23 4220,4855 4260,4815 4460,4815 4513.39,4761.61 U_m3.5 4514.53,4673.82 4563.82,4673.82 4565,4675 4585,4655 4585,4455 4515,4385 C_m3.2
  Top Layer w60: R_m33.2 C_m3.2
ICSPCLK: J_ICSP.5 U_pic.28 | length 195.1
  Top Layer w20: U_pic.28 4603.05,4971.38 4639.43,4935 J_ICSP.5
ICSPDAT: J_ICSP.4 U_pic.27 | length 462.9
  Top Layer w20: U_pic.27 4420,4910 4450,4880 4545,4880 4550,4885 v1(4555,4880) ; v1(4555,5035) J_ICSP.4
  Bottom Layer w20: v1(4555,4880) v1(4555,5035)
MCLR: J_ICSP.1 U_pic.1 | length 180.4
  Top Layer w20: U_pic.1 4471.02,5335 J_ICSP.1
NetR1_1: R1.1 R2.2 U1.1 | length 312.5
  Top Layer w60: R2.2 U1.1
NetR3_1: R3.1 R4.2 U2.1 | length 312.5
  Top Layer w60: R4.2 U2.1
NetR_m11_2: R_m11.2 U_m1.1 | length 1214
  Top Layer w20: R_m11.2 3086.34,5078.66 3132.68,5125 3178.33,5125 3213.33,5160 v1(3221.11,5160) ; v1(3720,4510) U_m1.1@3811.21,4510
  Bottom Layer w20: v1(3221.11,5160) 3360,5160 3720,4800 v1(3720,4510)
NetR_m12_2: R_m12.2 U_m1.8 | length 1103
  Top Layer w20: R_m12.2 v1(3167.05,4192.05) ; v1(3630,4285) 3630,4550 3757.68,4677.68 U_m1.8
  Bottom Layer w20: v1(3167.05,4192.05) 3213.52,4238.52 3583.52,4238.52 v1(3630,4285)
NetR_m21_2: R_m21.2 U_m2.1 | length 1136.1
  Top Layer w20: R_m21.2 3358.66,5078.66 v1(3440,5160) ; v1(4050,4550) 4045,4545 4055,4545 4055.74,4544.26 4055.74,4516.72 4067.46,4505 4100,4505
  Bottom Layer w20: v1(3440,5160) v1(4050,4550)
NetR_m22_2: R_m22.2 U_m2.8 | length 1159.6
  Top Layer w20: R_m22.2 3374.83,4192.05 3386.88,4180 v1(3395,4180) ; v1(3990,4470) 3990,4635 4032.68,4677.68 U_m2.8
  Bottom Layer w20: v1(3395,4180) 3585,4180 3635,4230 3810,4230 3985,4405 3985,4465 v1(3990,4470)
NetR_m31_2: R_m31.2 U_m3.1 | length 1418.7
  Top Layer w20: R_m31.2 3603.66,5078.66 v1(3605,5080) ; v1(4380,4390) 4380,4450 4425,4495
  Bottom Layer w20: v1(3605,5080) 4035,4650 4340,4650 4410,4580 4410,4425 4380,4395 v1(4380,4390)
NetR_m32_2: R_m32.2 U_m3.8 | length 1245
  Top Layer w20: R_m32.2 3541.34,4192.05 3578.13,4155.26 3629.74,4155.26 v1(3630,4155) ; v1(4355,4515) 4355,4645 4385,4675 4425,4675
  Bottom Layer w20: v1(3630,4155) 3805,4155 4000,4350 4255,4350 4355,4450 v1(4355,4515)
UART_Rx: P20.18 U_pic.18 | length 3012.3
  Top Layer w20: v1(3710,5165) 3750,5165 3830,5085 3955,5085 3970,5070 U_pic.18
  Bottom Layer w20: P20.18 2060,4580 2110,4630 2180,4630 2200,4610 2200,4460 2225,4435 2825,4435 2935,4545 2935,5165 3055,5285 3460,5285 3535,5210 3657.22,5210 3702.22,5165 v1(3710,5165)
UART_Tx: P20.16 U_pic.16 | length 2746.4
  Top Layer w20: v1(3730,5105) 3750,5105 3800,5055 3848.28,5055 3870,5033.28 U_pic.16
  Bottom Layer w20: P20.16 2150,4445 2205,4390 2845,4390 2985,4530 2985,5160 3065,5240 3445,5240 3520,5165 3605,5165 3665,5105 v1(3730,5105)
Vin: J5.1 J7.1 J100.1 J200.1 U1.3 U2.3 | length 5431.5
  Top Layer w60: J200.1 1320,1200 1515,1200 1675,1360 1675,1820.87 1551.06,1944.8 J100.1 1551.06,2246.06 1965,2660 2355,2660 2585,2890 2585,2988.47 2455,3118.47 2435,3138.47 U2.3 ; U1.3 1505,2913.47 1545,2873.47 1545,2270 ; 1520,1205 1920,1205 ; J5.1 2005,1290 1918.65,1203.65 2478.65,1203.65 2563.5,1288.5 2563.5,1368.27 J7.1
Vm1_a: P20.1 R_m11.1 Rshunt1.2 | length 692.1
  Top Layer w60: P20.1 2935.67,4680 2940.16,4684.49 3060.16,4684.49 3065,4689.33 Rshunt1.2 v1(3169.02,4695.98) ; R_m11.1 3071.34,4959.02 v1(3169.02,4959.02)
  Bottom Layer w60: v1(3169.02,4695.98) v1(3169.02,4959.02)
Vm1_b: P20.2 R_m12.1 Rshunt1.1 | length 667.9
  Top Layer w60: P20.2 3062.68,4580 Rshunt1.1 v1(3157.68,4577.68) ; R_m12.1 3073.03,4307.32 v1(3157.68,4307.32)
  Bottom Layer w60: v1(3157.68,4307.32) v1(3157.68,4577.68)
Vm2_a: P20.3 R_m21.1 Rshunt2.2 | length 1102.4
  Top Layer w60: P20.3 2750,4710 2825,4785 3205.98,4785 3283.5,4707.48 3290.16,4707.48 3295,4702.64 Rshunt2.2 v1(3390.98,4695.98) ; R_m21.1 3296.34,4959.02 v1(3390.98,4959.02)
  Bottom Layer w60: v1(3390.98,4695.98) v1(3390.98,4959.02)
Vm2_b: P20.4 R_m22.1 Rshunt2.1 | length 1082.4
  Top Layer w60: P20.4 2840,4490 3207.32,4490 3286.46,4569.13 3290.16,4569.13 3295,4573.98 Rshunt2.1 v1(3392.68,4577.68) ; R_m22.1 3295.35,4310 v1(3390,4310)
  Bottom Layer w60: v1(3390,4310) 3392.68,4312.68 v1(3392.68,4577.68)
Vm3_a: P20.5 R_m31.1 Rshunt3.2 | length 1331.3
  Top Layer w60: P20.5 2650,4755 2765,4870 3350.98,4870 3513.5,4707.48 3520.16,4707.48 Rshunt3.2@3525,4702.64 ; Rshunt3.2 Rshunt3.2@3525,4702.64 ; R_m31.1 Rshunt3.2@3525,4702.64
Vm3_b: P20.6 R_m32.1 Rshunt3.1 | length 1327
  Top Layer w60: P20.6 2650,4515 2765,4400 3347.32,4400 3516.46,4569.13 3520.16,4569.13 Rshunt3.1@3525,4573.98 ; R_m32.1 Rshunt3.1@3525,4573.98 ; Rshunt3.1 Rshunt3.1@3525,4573.98
pads on no net: U_m1.3 U_m1.6 U_m1.7 U_m2.3 U_m2.6 U_m2.7 U_m3.3 U_m3.6 U_m3.7 U_pic.2 U_pic.3 U_pic.4 U_pic.5 U_pic.6 U_pic.7 U_pic.9 U_pic.10 U_pic.11 U_pic.12 U_pic.13 U_pic.14 U_pic.15 U_pic.17 U_pic.24 U_pic.25 U_pic.26

## Other copper
Top Layer:

## Silkscreen, mask and mechanical layers (free items; w line width, h text height)
Top Overlay:
  text "PC104 Power and Testing Board" at 1080,5326.66 h80
  text "V 1.0" at 1085,5190 h80
  text "H1" at 3100,4020 h60
  text "PC104" at 3510,4020 h80
  text "H2" at 4205,4015 h60
  text "02 | 01" at 2830,3860 h40
  text "02 | 01" at 4465,3855 h40
  text "LM317T" at 2345,3765 h40
  text "04 | 03" at 2830,3755 h40
  text "04 | 03" at 4465,3750 h40
  text "06 | 05" at 2830,3660 h40
  text "06 | 05" at 4465,3655 h40
  text "08 | 07" at 2830,3560 h40
  text "08 | 07" at 4465,3555 h40
  text "LM317T" at 1395,3535 h40
  text "10 | 09" at 2835,3460 h40
  text "10 | 09" at 4470,3455 h40
  text "12 | 11" at 2835,3360 h40
  text "12 | 11" at 4470,3355 h40
  text "14 | 13" at 2835,3260 h40
  text "14 | 13" at 4470,3255 h40
  text "16 | 15" at 2835,3165 h40
  text "16 | 15" at 4470,3160 h40
  text "18 | 17" at 2835,3055 h40
  text "18 | 17" at 4470,3050 h40
  text "20 | 19" at 2830,2960 h40
  text "20 | 19" at 4465,2955 h40
  text "22 | 21" at 2830,2860 h40
  text "22 | 21" at 4465,2855 h40
  text "24 | 23" at 2830,2765 h40
  text "24 | 23" at 4465,2760 h40
  text "26 | 25" at 2830,2660 h40
  text "26 | 25" at 4465,2655 h40
  text "28 | 27" at 2830,2560 h40
  text "28 | 27" at 4465,2555 h40
  text "Power pins" at 1865,2496.66 h80
  text "30 | 29" at 2830,2465 h40
  text "30 | 29" at 4465,2460 h40
  text "32 | 31" at 2830,2365 h40
  text "32 | 31" at 4465,2360 h40
  text "34 | 33" at 2830,2260 h40
  text "34 | 33" at 4465,2255 h40
  text "36 | 35" at 2830,2160 h40
  text "36 | 35" at 4465,2155 h40
  text "38 | 37" at 2830,2060 h40
  text "38 | 37" at 4465,2055 h40
  text "40 | 39" at 2830,1960 h40
  text "40 | 39" at 4465,1955 h40
  text "42 | 41" at 2830,1860 h40
  text "42 | 41" at 4465,1855 h40
  text "44 | 43" at 2830,1760 h40
  text "44 | 43" at 4465,1755 h40
  text "46 | 45" at 2830,1660 h40
  text "46 | 45" at 4465,1655 h40
  text "48 | 47" at 2830,1560 h40
  text "48 | 47" at 4465,1555 h40
  text "12VDC" at 1200,1505 h60
  text "50 | 49" at 2830,1460 h40
  text "50 | 49" at 4465,1455 h40
  text "------3.3V-----" at 2145,1440 h60 r90
  text "-------5V------" at 2715,1440 h60 r90
  text "52 | 51" at 2830,1360 h40
  text "52 | 51" at 4465,1355 h40
  text "------GND-------" at 2345,1350 h60 r90
  text "------GND-------" at 1835,1345 h60 r90
  text "12V" at 2085,1340 h60
  text "12V" at 2645,1325 h60

## Text inside footprints (layer, text, board x,y; h text height)
J5: Top Overlay "1" at 1938.07,1370.04 h40 r90; Top Overlay "10" at 1938.07,2249.96 h40 r90
J6: Top Overlay "10" at 2398.07,2244.96 h40 r90; Top Overlay "1" at 2398.07,1365.04 h40 r90
J7: Top Overlay "1" at 2498.07,1365.04 h40 r90; Top Overlay "10" at 2498.07,2244.96 h40 r90
J8: Top Overlay "1" at 1838.07,1370.04 h40 r90; Top Overlay "10" at 1838.07,2249.96 h40 r90
P20: Top Overlay "20" at 1890,4600 h50 r180; Top Overlay "19" at 1890,4700 h50 r180; Top Overlay "1" at 2950,4700 h50 r180; Top Overlay "2" at 2950,4600 h50 r180